# Altium PCB GPS.PcbDoc
Units mil, origin at the board's own origin, x right, y up, seen from the top; angles counter-clockwise.
Board outline 1574.8 x 1574.8 mil, 4 copper layers (Top Layer, Mid Layer 1, Mid Layer 2, Bottom Layer), stack 61.811 mil thick; 21 components, 16 nets, 92 pads, 613 vias.
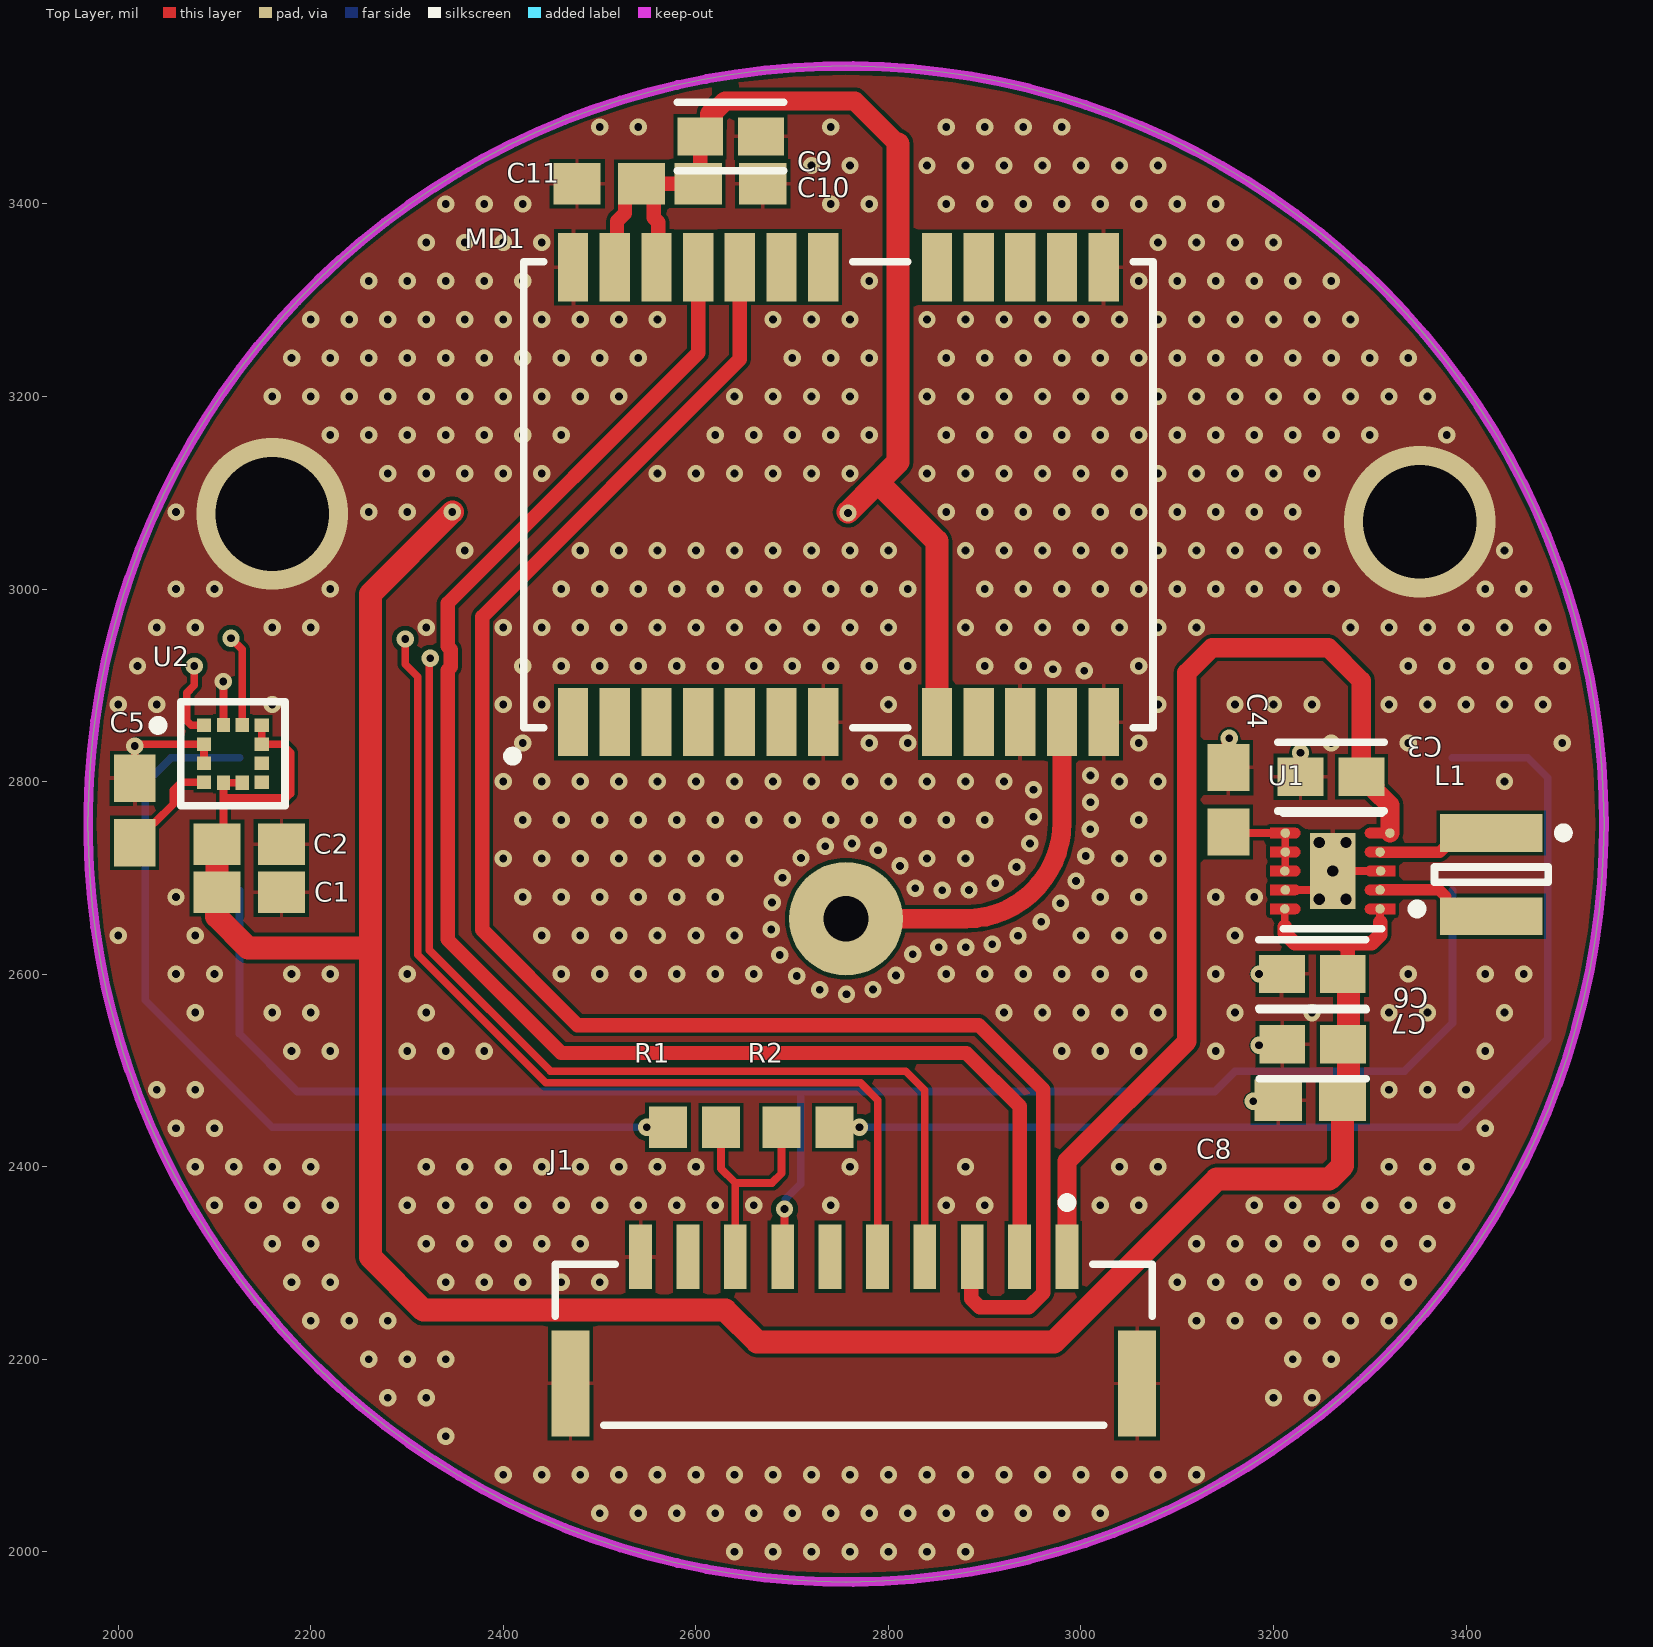
[diagram p0: Top Layer view]
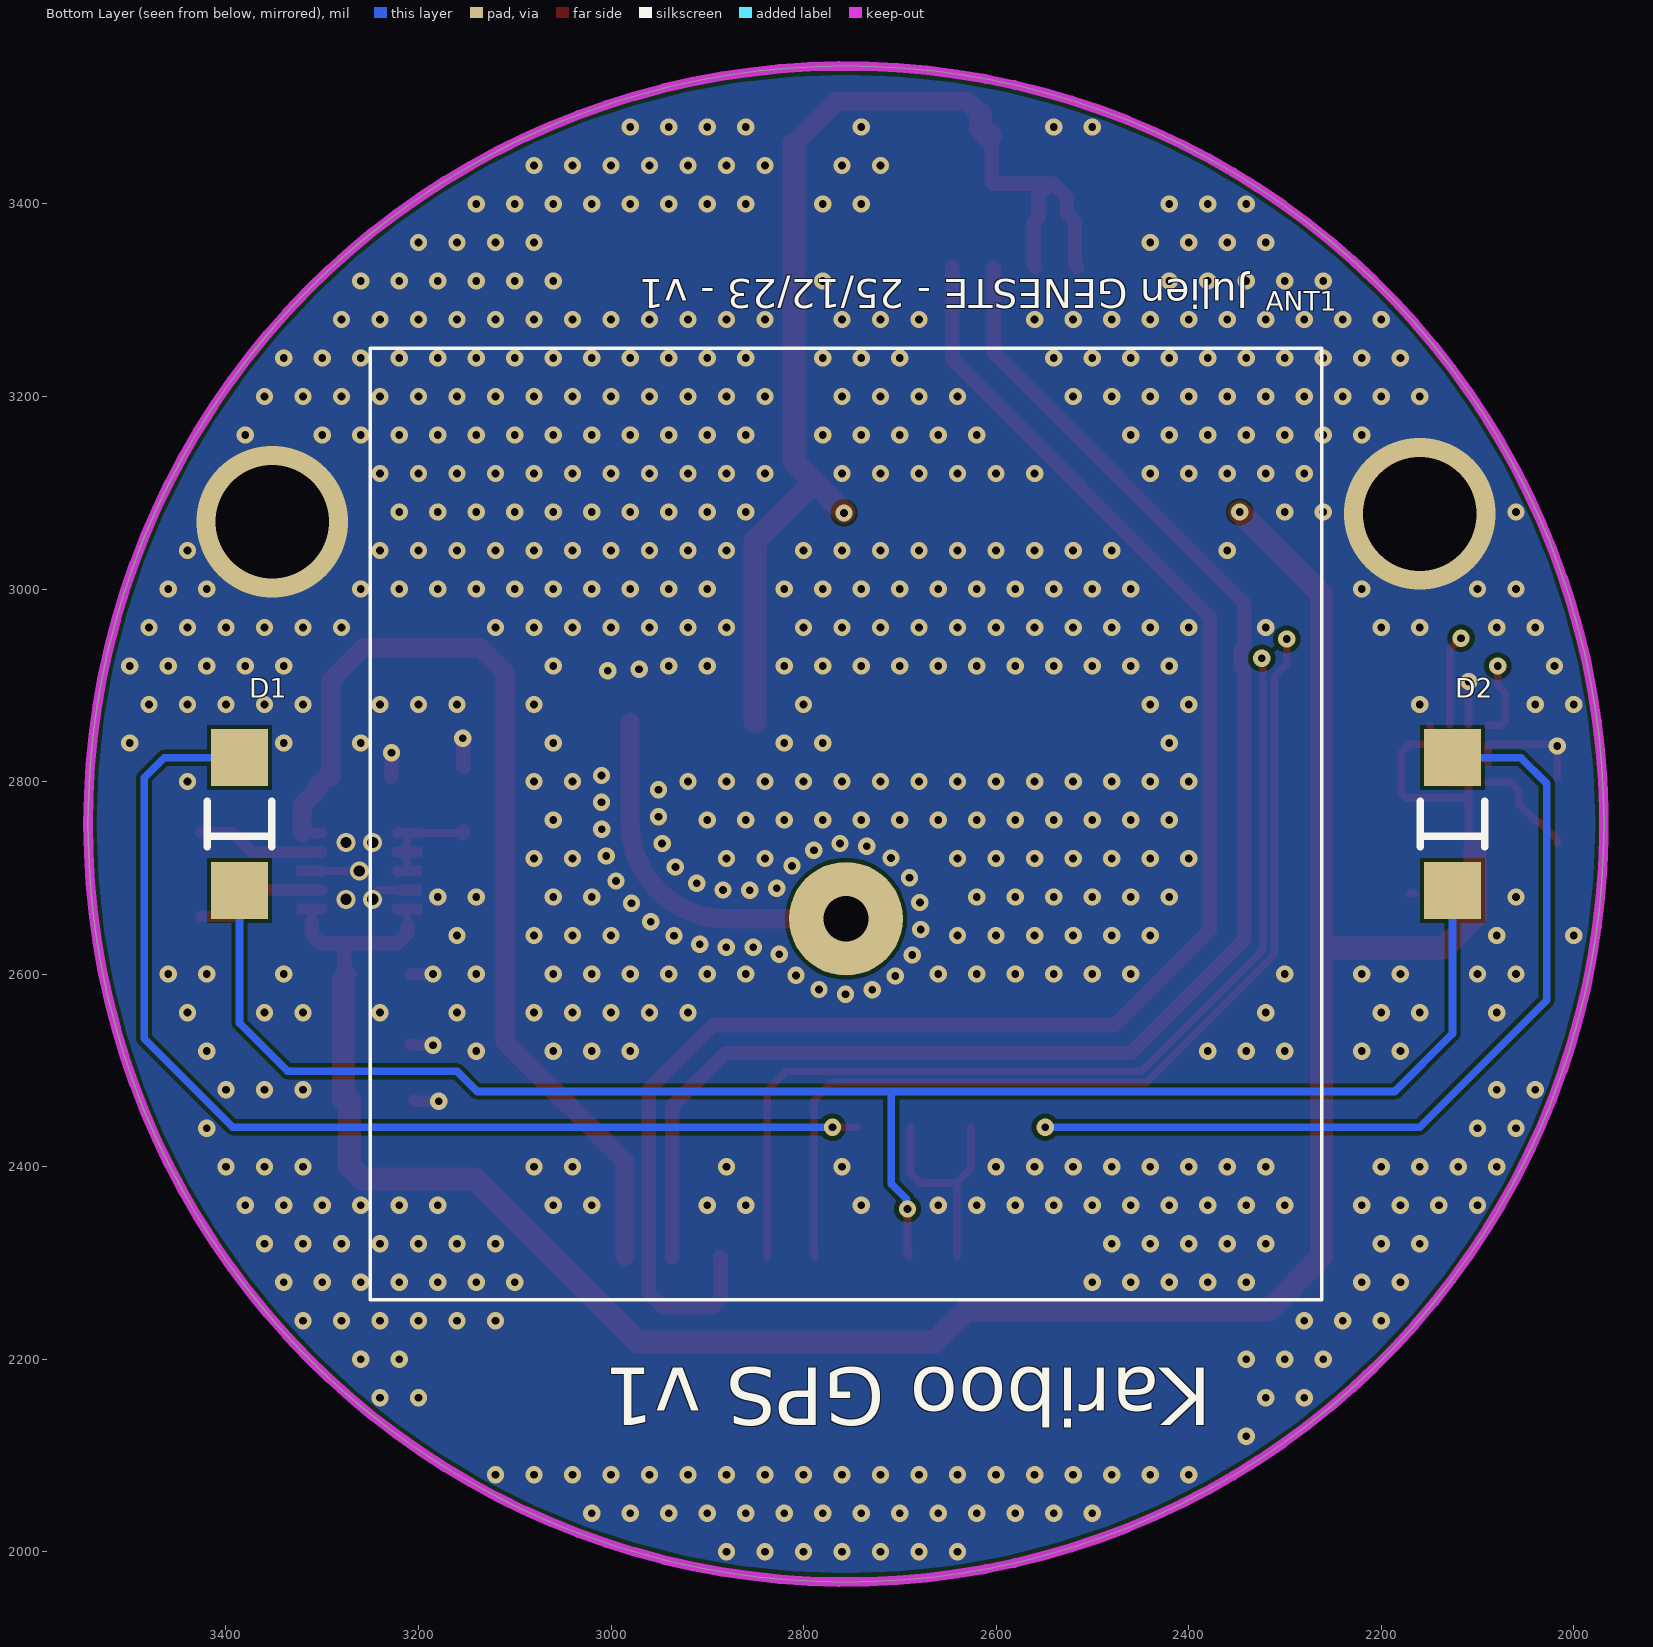
[diagram p1: Bottom Layer view, seen from below]
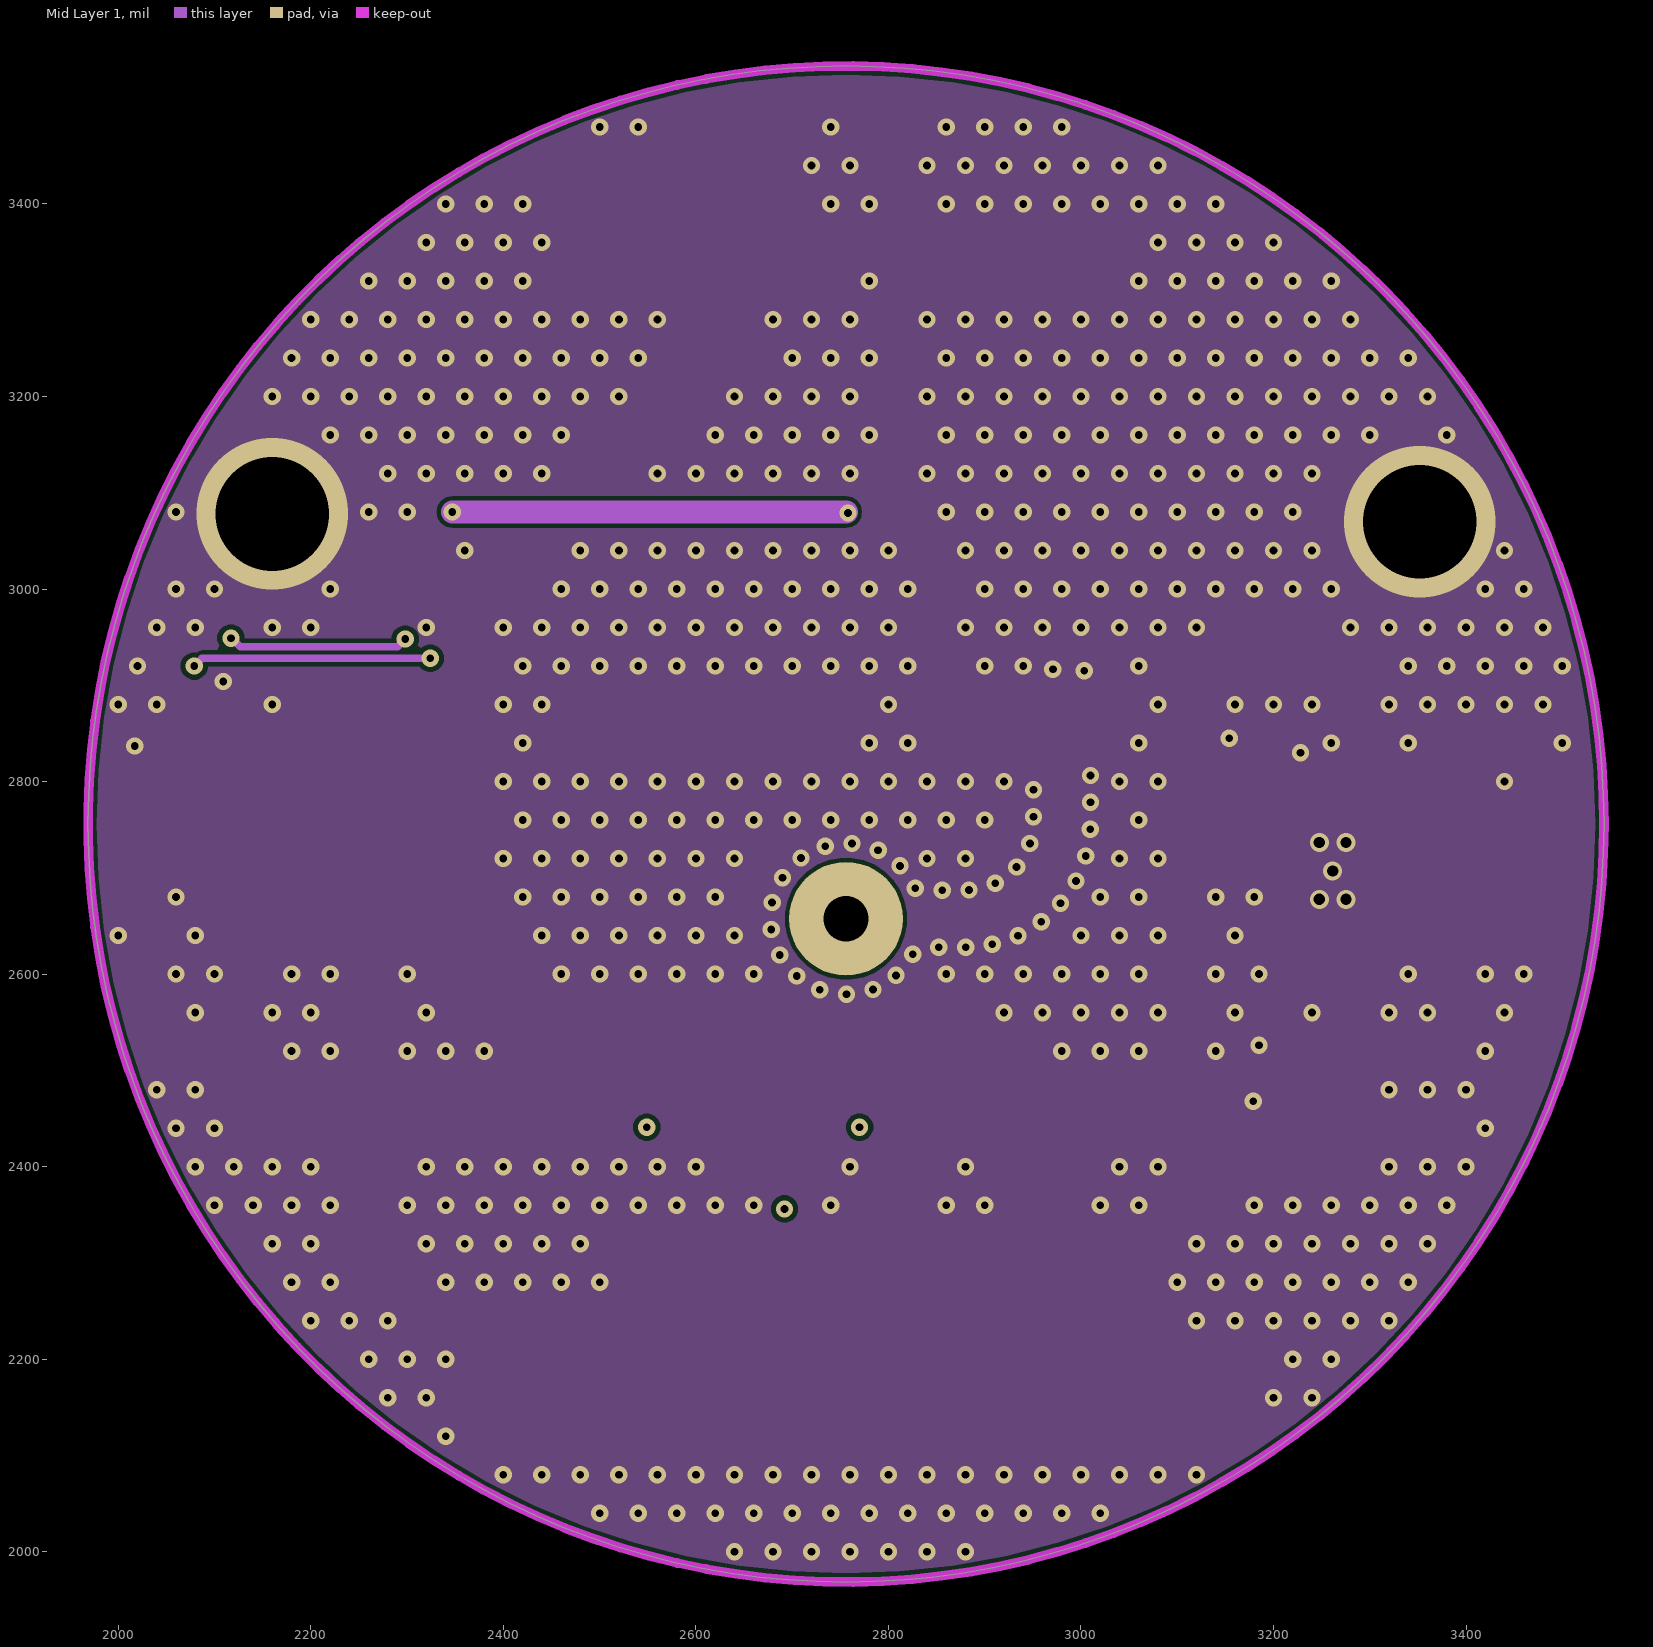
[diagram p2: Mid Layer 1]
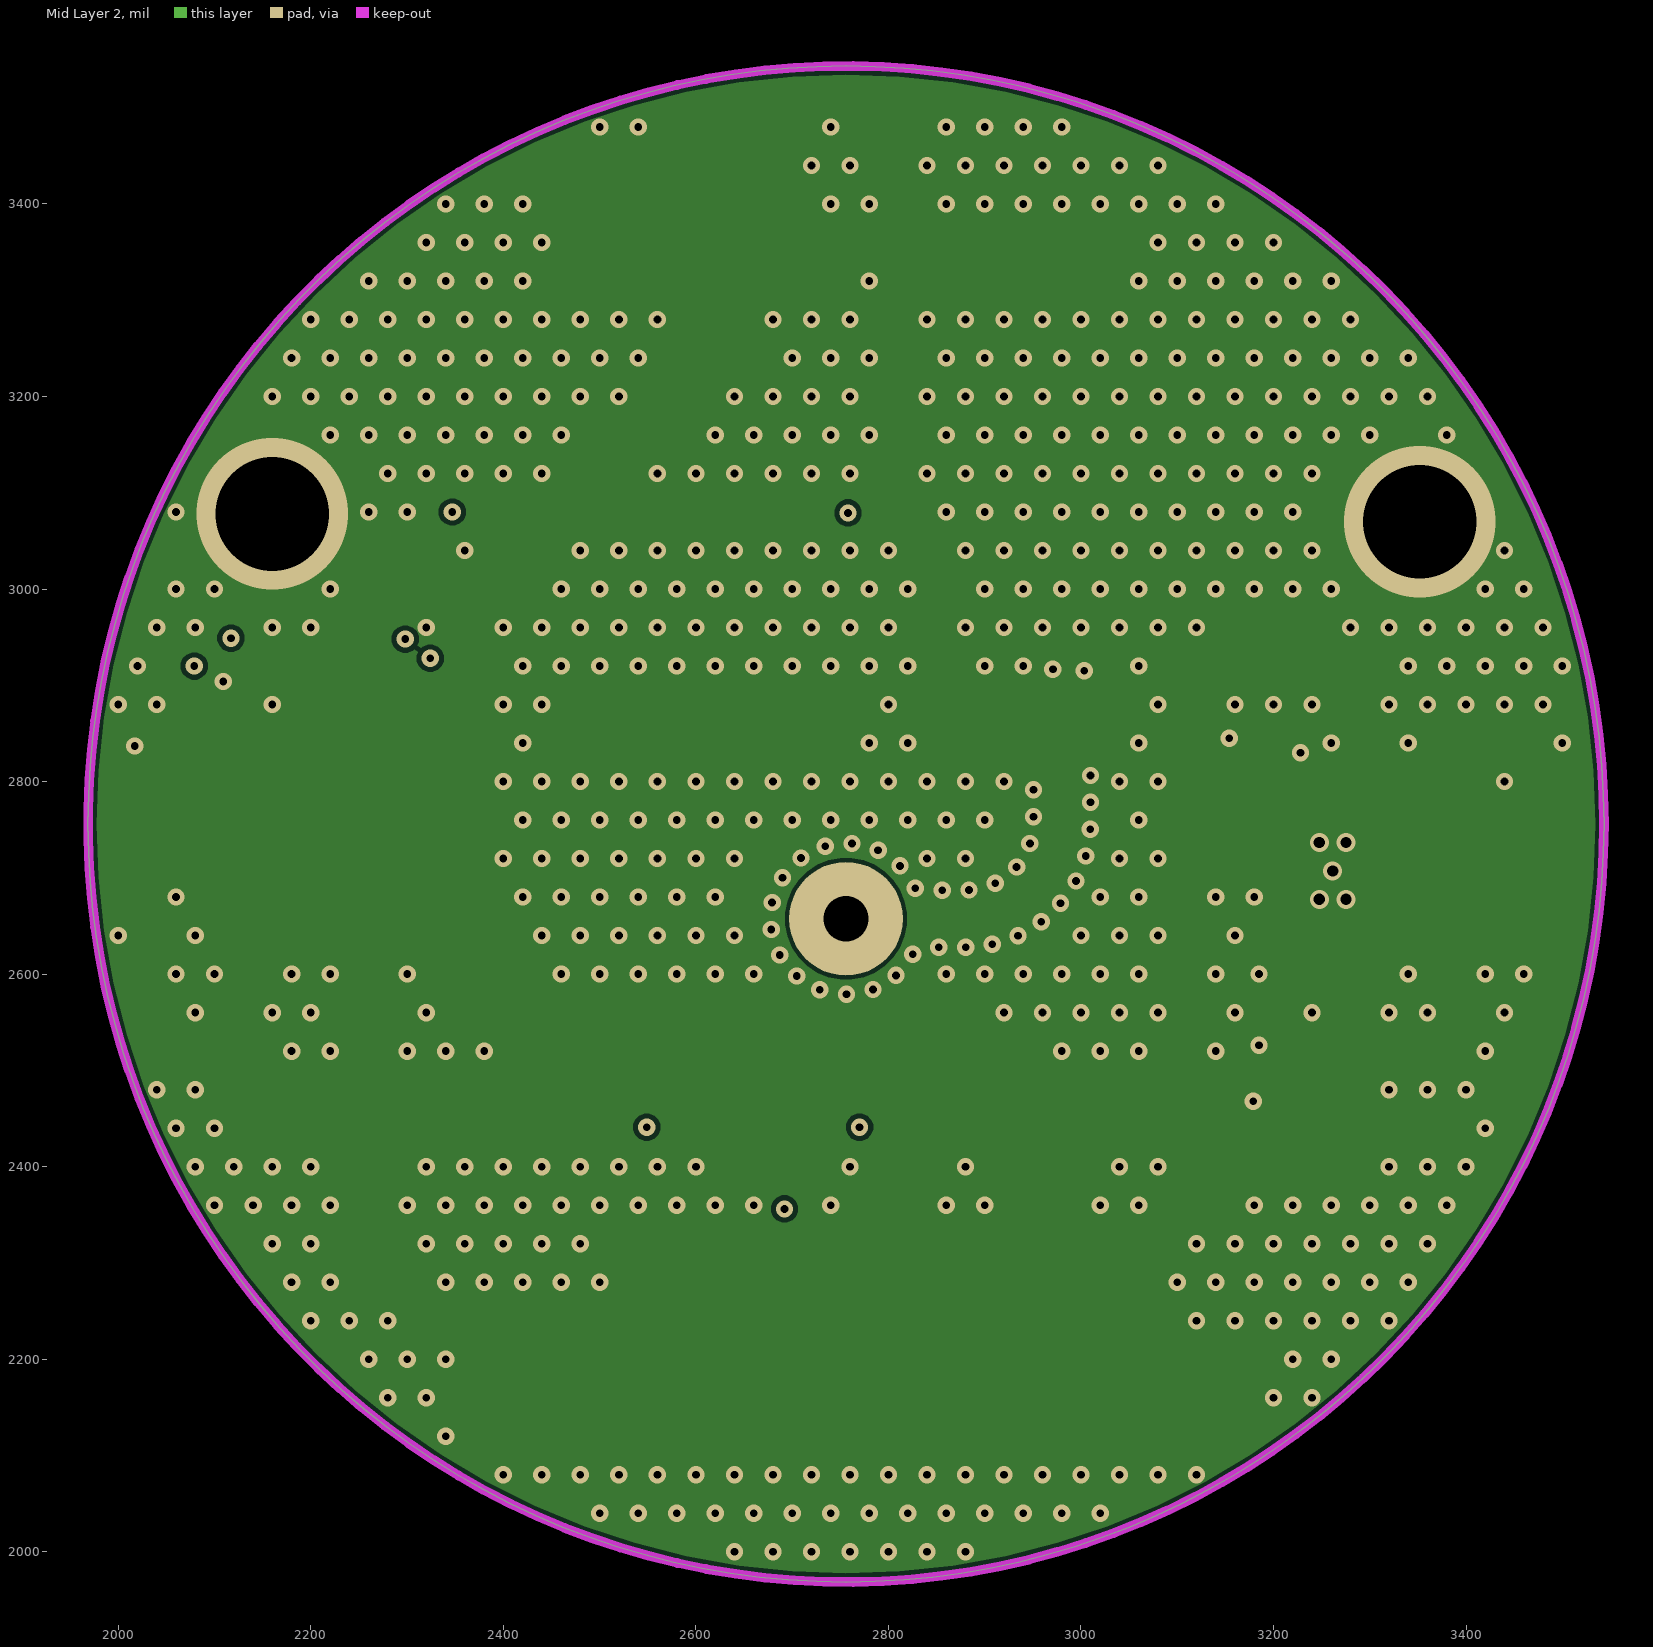
[diagram p3: Mid Layer 2]

## Layer stack, top to bottom
Top Solder: solder mask 0.5, Solder Resist, Dk 3.8
Top Layer: signal copper 1.378
Dielectric 1: prepreg 3.937, 2313, Dk 4.05
Mid Layer 1: signal copper 0.689
Core: core 49.8031, FR-4, Dk 4.5
Mid Layer 2: signal copper 0.689
Dielectric 2: prepreg 3.937, 2313, Dk 4.05
Bottom Layer: signal copper 1.378
Bottom Solder: solder mask 0.5, Solder Resist, Dk 3.8

## Board outline
2755.91,1968.5 cw(c2755.91,2755.91) 1968.5,2755.91 cw(c2755.91,2755.91) 2755.91,3543.31 cw(c2755.91,2755.91) 3543.31,2755.91 cw(c2755.91,2755.91)

## Design rules (kind name [scope] priority, off if disabled: settings)
BoardOutlineClearance [All] p1: gap=7.87 ignorepadtopadclearanceinfootprint=FALSE
Clearance [All] p1: gap=4 ignorepadtopadclearanceinfootprint=FALSE except(5: Arc-Via Track-Via SMDPad-Via THPad-Via Via-Via Via-Fill Via-Poly Via-Region Via-Text; 9.84: Arc-Hole Track-Hole SMDPad-Hole THPad-Hole Via-Hole Fill-Hole Poly-Hole Region-Hole Text-Hole)
ComponentClearance [All] p1: gap=4 collisioncheckmode=3 verticalgap=4 showdistances=TRUE
DiffPairsRouting [All] p1: maxlimit=4 minlimit=4 mostfreqgap=4 toplayer_minwidth=4 toplayer_maxwidth=71497.94 toplayer_prefwidth=4 midlayer1_minwidth=4 midlayer1_maxwidth=71497.94 midlayer1_prefwidth=4 midlayer2_minwidth=4 midlayer2_maxwidth=71497.94 midlayer2_prefwidth=4 bottomlayer_minwidth=4 bottomlayer_maxwidth=71497.94 bottomlayer_prefwidth=4 maxuncoupledlength=500
Height [All] p1: minheight=0 maxheight=71497.94 prefheight=500
HoleSize [All] p1: absolutevalues=TRUE maxlimit=248.03 minlimit=7.87 maxpercent=80.000 minpercent=20.000
HoleToHoleClearance [All] p1: gap=9.84 allowstackedmicrovias=FALSE
MinimumAnnularRing [All] p1: minimumring=3
MinimumSolderMaskSliver [All] p1: minsoldermaskwidth=0
PlaneClearance [All] p1: clearance=4
PlaneConnect PlaneConnectPowerPads [InPadClass('PowerPads')] p1: planeconnectstyle=Direct reliefexpansion=20 reliefentries=4 reliefconductorwidth=10 reliefairgap=10
PlaneConnect [All] p2: pad.planeconnectstyle=Relief pad.reliefexpansion=11.81 pad.reliefentries=4 pad.reliefconductorwidth=4 pad.reliefairgap=4 via.planeconnectstyle=Direct via.reliefexpansion=11.81 via.reliefentries=4 via.reliefconductorwidth=5 via.reliefairgap=5
PolygonConnect PolygonConnectPowerPads [All vs (InPadClass('PowerPads'))] p1: connectstyle=Direct reliefconductorwidth=10 reliefentries=4 polygonreliefangle="90 Angle" airgapwidth=10
PolygonConnect [All] p2: thpad.connectstyle=Relief thpad.reliefconductorwidth=4 thpad.reliefentries=4 thpad.polygonreliefangle="90 Angle" thpad.airgapwidth=4 smdpad.connectstyle=Relief smdpad.reliefconductorwidth=4 smdpad.reliefentries=4 smdpad.polygonreliefangle="90 Angle" smdpad.airgapwidth=4 via.connectstyle=Direct via.reliefconductorwidth=5 via.reliefentries=4 via.polygonreliefangle="90 Angle" via.airgapwidth=5
RoutingVias [All] p1: holewidth=7.87 width=17.72 viastyle="Through Hole" minholewidth=7.87 minwidth=17.72 maxholewidth=248.03 maxwidth=257.87
SilkToSilkClearance [All] p1: silktosilkclearance=0
SilkToSolderMaskClearance [IsPad] p1: minsilkscreentomaskgap=4 clearancetoexposedcopper=TRUE
SolderMaskExpansion [All] p1: expansion=2.95 istentingtop=FALSE
Width [All] p1: maxlimit=71497.94 minlimit=4 preferedwidth=4
20 further rules are at their usual default settings.

## Components (designator, comment, footprint, x,y, rotation, side; value= is the part's Value field where it differs from the comment)
ANT1 "CGGP.25.4.E.02" CGGP254E02 2755.91,2755.91 r180 bottom
C1 "100nF 0603" CAPC1608X90X35ML15T15 2136,2685 r0 top
C2 "100nF 0603" CAPC1608X90X35ML15T15 2136,2735 r0 top
C3 "10uF 0603" FP-GRM188-0_1-e0_2_0_55-IPC_A 3259.68,2805.1 r180 top
C4 "100nF 0603" CAPC1608X90X35ML15T15 3153.25,2781.1 r270 top
C5 "100nF 0603" CAPC1608X90X35ML15T15 2017,2770 r90 top
C6 "10uF 0603" FP-GRM188-0_1-e0_2_0_55-IPC_A 3240.25,2600.1 r180 top
C7 "10uF 0603" FP-GRM188-0_1-e0_2_0_55-IPC_A 3240.68,2527.1 r180 top
C8 "100nF 0603" CAPC1608X90X35ML15T15 3238.25,2469.1 r0 top
C9 "10uF 0603" FP-GRM188-0_1-e0_2_0_55-IPC_A 2636,3470 r0 top
C10 "100nF 0603" CAPC1608X90X35ML15T15 2636,3421 r180 top
C11 "100nF 0603" CAPC1608X90X35ML15T15 2510,3421 r0 top
D1 "HSMG-C150" FP-HSMG-C150-MFG 3385.83,2755.91 r90 bottom
D2 "HSMG-C150" FP-HSMG-C150-MFG 2125.98,2755.91 r90 bottom
J1 "BM10B-GHS-TBT(LF)(SN)(N)" FP-BM10B-GHS-TBT_LF_SN-MFG 2764,2215 r0 top
L1 "SRN3015-1R5Y" BOUR-SRN3015-2_V 3426.25,2703.4 r270 top
MD1 "NEO-M9N-00B" FP-NEO-M9N-00B-MFG 2748,3098 r180 top
R1 "ERA-3AEB391V" RESC1608X55X30ML20T20 2598.43,2440.94 r0 top
R2 "ERA-3AEB391V" RESC1608X55X30ML20T20 2716.54,2440.94 r180 top
U1 "TPS63031DSKR" FP-DSK0010A-MFG 3261.46,2707.1 r180 top
U2 "LIS3MDLTR" FP-VFLGA-12-8365767-MFG 2119.02,2828.84 r0 top

## Footprints (in the part's own frame and the unit in brackets; to place one, negate y for a bottom-side part, rotate by r counter-clockwise, add the part's x,y. Pads: shape width x height; smd on the part's side, far side on the other; paste and mask are expansions set on the pad)
BOUR-SRN3015-2_V [mm] "SMD, 2-Leads, Body 3x3mm, Height 1.5mm"
  rect 1x2.7 smd: 1(-1.1,0) 2(1.1,0)
  silkscreen extent -1.22,-1.5 0.2,2.03, body extent -1.5,-1.5 1.5,1.5, height 1.5
CAPC1608X90X35ML15T15 [mm] "Chip Capacitor, 2-Leads, Body 1.60x0.81mm, IPC Low Density"
  rect 1.25x1.1 smd: 1(-0.85,0) 2(0.85,0)
  body extent -0.88,-0.48 0.87,0.48, height 0.9
CGGP254E02 [mm]
  round 3 hole 1.2: 1(0,-2.5)
  silkscreen extent -12.55,-12.55 12.55,12.55, body extent -12.55,-12.55 12.55,12.55, height 5.4
FP-BM10B-GHS-TBT_LF_SN-MFG [mm]
  rect 0.6x1.7 smd paste+0 mask+0: 1(5.625,2.325) 2(4.375,2.325) 3(3.125,2.325) 4(1.875,2.325) 5(0.625,2.325) 6(-0.625,2.325) 7(-1.875,2.325) 8(-3.125,2.325) 9(-4.375,2.325) 10(-5.625,2.325)
  rect 1x2.8 smd paste+0 mask+0: 11(-7.475,-1.025) 12(7.475,-1.025)
  silkscreen extent -7.88,-2.12 7.88,3.87, body extent -8.08,-2.52 8.08,3.27, height 0.25
FP-DSK0010A-MFG [mm]
  round 0.252 smd paste-1000 mask+0: 1(-1.25,1) 2(-1.25,0.5) 3(-1.264,0) 4(-1.25,-0.5) 5(-1.51,-1) 6(1.25,-1) 7(1.25,-0.5) 8(1.264,0) 9(1.25,0.5) 10(1.264,1)
  rect 1.2x2 smd paste-1000 mask+0: 11(0,0)
  Top Layer region: 1.65,0.86 0.99,0.86 0.936,0.871 0.891,0.901 0.861,0.946 0.85,1 0.85,1 0.861,1.054 0.891,1.099 0.936,1.129 0.99,1.14 0.99,1.14 1.65,1.14
  Top Layer region: 1.65,0.36 0.99,0.36 0.936,0.371 0.891,0.401 0.861,0.446 0.85,0.5 0.85,0.5 0.861,0.554 0.891,0.599 0.936,0.629 0.99,0.64 0.99,0.64 1.65,0.64
  Top Layer region: 1.65,-0.14 0.99,-0.14 0.936,-0.129 0.891,-0.099 0.861,-0.054 0.85,0 0.85,0 0.861,0.054 0.891,0.099 0.936,0.129 0.99,0.14 0.99,0.14 1.65,0.14
  Top Layer region: 1.65,-0.64 0.99,-0.64 0.936,-0.629 0.891,-0.599 0.861,-0.554 0.85,-0.5 0.85,-0.5 0.861,-0.446 0.891,-0.401 0.936,-0.371 0.99,-0.36 0.99,-0.36 1.65,-0.36
  Top Layer region: 1.65,-1.14 0.99,-1.14 0.936,-1.129 0.891,-1.099 0.861,-1.054 0.85,-1 0.85,-1 0.861,-0.946 0.891,-0.901 0.936,-0.871 0.99,-0.86 0.99,-0.86 1.65,-0.86
  Top Layer region: -1.65,-0.86 -0.99,-0.86 -0.936,-0.871 -0.891,-0.901 -0.861,-0.946 -0.85,-1 -0.85,-1 -0.861,-1.054 -0.891,-1.099 -0.936,-1.129 -0.99,-1.14 -0.99,-1.14 -1.65,-1.14
  Top Layer region: -1.65,-0.36 -0.99,-0.36 -0.936,-0.371 -0.891,-0.401 -0.861,-0.446 -0.85,-0.5 -0.85,-0.5 -0.861,-0.554 -0.891,-0.599 -0.936,-0.629 -0.99,-0.64 -0.99,-0.64 -1.65,-0.64
  Top Layer region: -1.65,0.14 -0.99,0.14 -0.936,0.129 -0.891,0.099 -0.861,0.054 -0.85,0 -0.85,0 -0.861,-0.054 -0.891,-0.099 -0.936,-0.129 -0.99,-0.14 -0.99,-0.14 -1.65,-0.14
  Top Layer region: -1.65,0.64 -0.99,0.64 -0.936,0.629 -0.891,0.599 -0.861,0.554 -0.85,0.5 -0.85,0.5 -0.861,0.446 -0.891,0.401 -0.936,0.371 -0.99,0.36 -0.99,0.36 -1.65,0.36
  Top Layer region: -1.65,1.14 -0.99,1.14 -0.936,1.129 -0.891,1.099 -0.861,1.054 -0.85,1 -0.85,1 -0.861,0.946 -0.891,0.901 -0.936,0.871 -0.99,0.86 -0.99,0.86 -1.65,0.86
  silkscreen extent -2.35,-1.53 1.3,1.53, body extent -1.75,-1.4 1.75,1.4, height 0.25
FP-GRM188-0_1-e0_2_0_55-IPC_A [mil]
  rect 47.57x39.85 smd paste+0 mask+0: 1(-31.57,0) 2(31.57,0)
  silkscreen extent -55,-36 55,36, body extent -75,-40 75,40, height 10
FP-HSMG-C150-MFG [mm]
  rect 1.5x1.5 smd paste+0 mask+0: 1(-1.75,0) 2(1.75,0)
  silkscreen extent -0.6,-0.85 0.6,0.85, body extent -1.6,-0.8 1.6,0.8, height 1.2
FP-NEO-M9N-00B-MFG [mm]
  rect 0.8x1.8 smd paste-1000 mask-1000: 1(7,6) 2(5.9,6) 3(4.8,6) 4(3.7,6) 5(2.6,6) 6(1.5,6) 7(0.4,6) 8(-2.6,6) 9(-3.7,6) 10(-4.8,6) 11(-5.9,6) 12(-7,6) 13(-7,-6) 14(-5.9,-6) 15(-4.8,-6) 16(-3.7,-6) 17(-2.6,-6) 18(0.4,-6) 19(1.5,-6) 20(2.6,-6) 21(3.7,-6) 22(4.8,-6) 23(5.9,-6) 24(7,-6)
  silkscreen extent -8.3,-6.15 8.72,7.02, body extent -8.4,-7.4 8.4,7.4, height 0.25
FP-VFLGA-12-8365767-MFG [mm]
  rect 0.375x0.35 smd paste+0 mask+0: 1(-0.763,0.75) 2(-0.763,0.25) 3(-0.763,-0.25) 4(-0.763,-0.75) 7(0.763,-0.75) 8(0.763,-0.25) 9(0.763,0.25) 10(0.763,0.75)
  rect 0.35x0.375 smd paste+0 mask+0: 5(-0.25,-0.763) 6(0.25,-0.763) 11(0.25,0.763) 12(-0.25,0.763)
  silkscreen extent -2.1,-1.38 1.38,1.38, body extent -1.58,-1.58 1.58,1.58, height 0.25
RESC1608X55X30ML20T20 [mm] "Chip Resistor, 2-Leads, Body 1.60x0.80mm, IPC Low Density"
  rect 1x1.1 smd: 1(-0.7,0) 2(0.7,0)
  body extent -0.9,-0.5 0.9,0.5, height 0.55

## Part data
ANT1: "Antenna", Manufacturer_Name=Taoglas, Mouser Part Number=960-CGGP.25.4.E.02, Arrow Part Number=CGGP.25.4.E.02, Arrow Price/Stock=https://www.arrow.com/en/products/cggp.25.4.e.02/taoglas?region=nac, Datasheet Link=https://www.taoglas.com/wp-content/uploads/2015/04/CGGP.25.4.E.02.pdf, Height=5.3mm, Manufacturer_Part_Number=CGGP.25.4.E.02, Mouser Price/Stock=https://www.mouser.co.uk/ProductDetail/Taoglas/CGGP.25.4.E.02?qs=GmNq1OH0n5S3R7U0xHuQag%3D%3D
C1 C2 C4 C5 C8 C10 C11: library part CMP-2006-04496-1, Manufacturer="AVX Interconnect / Elco", Part Number=0603YC104KAZ2A
C3 C6 C7 C9: library part CMP-2006-02792-2, "Chip Multilayer Ceramic Capacitors for General Purpose, 0603, 10uF, X5R, 15%, 20%, 6.3V", Capacitance=10uF, Case Code (Imperial)=0603, Case Code (Metric)=1608, Dielectric=X5R, Max Operating Temperature=85°C, Min Operating Temperature=-55°C, Package Quantity=4000, Tolerance=20%, Voltage=6.3V, Case/Package=0603, Depth=0.8mm, Height=0.8mm, Lead Free="Lead Free", Length=1.6mm, Material=Ceramic, Mount="Surface Mount", Packaging="Tape and Reel", Radiation Hardening=No, REACH SVHC="No SVHC", Termination=SMD/SMT, Thickness=0.035inch, Voltage Rating=6.3V, Voltage Rating (DC)=6.3V, Width=0.031inch
D1 D2: library part CMP-2000-05061-2, "LED GREEN DIFFUSED 1206 SMD", Colour=Green, Forward Current=20mA, Forward Voltage=2.2V, Manufacturer=Broadcom, Max Junction Temp=+95°C, Power Dissipation=65mW, Reverse Voltage=5V, Temperature="-40°C to +85°C", Temperature Range High=+85°C, Temperature Range Low=-40°C, Automotive=No, Category=Diode, ComponentLink2Description=Datasheet, ComponentLink2URL=https://docs.broadcom.com/docs/AV02-0551EN, Device Class L1=Optoelectronics, Device Class L2=LEDs, Device Class L3=unset, Digikey Description="LED GREEN DIFFUSED 1206 SMD", Height=1.2mm, Ipc Land Pattern Name=DIOCP320160X55, Lead Free=Yes, Led Orientation="Top View", Luminous Intensity=15mcd, Manufacturer Part Number=HSMG-C150, Mouser Description="LED Uni-Color Green 570nm 2-Pin Chip LED T/R", Octopart=https://octopart.com/hsmg-c150-broadcom-71131304, Package=HSMG-C150, Peak Emmision Wavelength=570nm, RoHS=TRUE, Viewing Angle=170°, Wavelength=572nm
J1: library part CMP-17439-000269-1, "CONN HEADER SMD 10POS 1.25MM", Flammability Rating="UL94 V-0", Insulation Color=Natural, Max Operating Temperature=85°C, Min Operating Temperature=-25°C, Voltage Rating=50V, Connector Type=Header, Contact Finish - Mating=TIN, Contact Material=Bronze, Contact Shape=Rectangular, Contact Type="Outer Shroud Contact", Fastening Type=Ramp, Insulation Material=Nylon, Mated Stacking Heights=7.3mm, Mount="Surface Mount", Number of Positions=10, Number of Rows=1, Packaging="Cut Tape", Series=GH, Termination=Solder
L1: library part CMP-0007-00008-1, "Semi-shielded Power Inductor, 1.5 uH, +/- 30%, 2.1 A, -40 to 125 degC, 3 x 3 x 1.5 mm SMD, RoHS and Halogen Free, Tape and Reel", Inductance="1.5 uH", Inductance tolerance="+/- 30%", Manufacturer=Bourns, Operating Temperature="-40 to 125 degC", Rated current="2.1 A", Resistance to Solder Heat="+260 degC for 10 sec.", ComponentLink1Description="Manufacturer URL", ComponentLink1URL=http://www.bourns.com/, ComponentLink2Description=Datasheet, ComponentLink2URL=http://www.bourns.com/data/global/pdfs/SRN3015.pdf, ComponentLink3Description="Package Specification", ComponentLink3URL=http://www.bourns.com/data/global/pdfs/SRN3015.pdf, DatasheetVersion=Aug-11, DCR Max="0.066 Ohm", Isat="2 A", Mounting Technology="Surface Mount", PackageDescription="2-Pin SMD, Body 3 x 3 mm, Height 1.5 mm", PackageReference=SRN3015, Packing="Tape and Reel", PartNumber=SRN3015-1R5Y, RoHS=TRUE, SRF Min="130 MHz"
MD1: library part CMP-207130-000006-2, "M9 standard precision module", Manufacturer=u-blox, Max Supply Voltage=3.6V, Min Supply Voltage=1.65V, Package=0, Temperature="-40°C to +85°C", Temperature Range High=+85°C, Temperature Range Low=-40°C, Automotive=No, Category=UNK, ComponentLink2Description=Datasheet, ComponentLink2URL=https://www.u-blox.com/sites/default/files/NEO-M9N_DataSheet_%28UBX-19014285%29.pdf, Device Class L1="Integrated Circuits (ICs)", Device Class L2="RF Semiconductors and Devices", Device Class L3="RF Receivers", Footprint Url=https://www.u-blox.com/sites/default/files/NEO-M9N_Integrationmanual_%28UBX-19014286%29.pdf, Height=2.6mm, Interface=I2C,SPI,UART,USB, Lead Free=Yes, Manufacturer Part Number=NEO-M9N-00B, Octopart=https://octopart.com/neo-m9n-00b-u-blox-107315722, RoHS=TRUE, Sensitivity=-167dBm
R1 R2: library part CMP-2000-00051-1, Manufacturer=Panasonic, Part Number=ERA-3AEB391V
U1: library part CMP-04918-000123-1, "IC REG BCK BST ADJ 900MA 10SON", Ambient Temperature Range High=+85°C, Ambient Temperature Range Low=-40°C, Manufacturer="Texas Instruments", Max Junction Temp=+125°C, Max Supply Voltage=5.5V, Min Supply Voltage=1.8V, Nominal Supply Current=25uA, Output Current=1A, Output Voltage=1.2-5.5V, Package=DSK0010A, Switching Frequency=2400kHz, Temperature="-40°C to +85°C", Automotive=No, Category=IC, ComponentLink2Description=Datasheet, ComponentLink2URL=http://www.ti.com/lit/ds/symlink/tps63030.pdf, Device Class L1="Integrated Circuits (ICs)", Device Class L2="Power Management ICs", Device Class L3="Voltage Regulators - Switching", Digikey Description="IC REG BCK BST ADJ 900MA 10SON", Height=0.8mm, Ipc Land Pattern Name=DFN250X250X75-10, Lead Free=Yes, Manufacturer Part Number=TPS63031DSKR, Max Duty Cycle=100%, Mouser Description="Voltage Regulators - Switching Regulators Hi Eff Sgl Inductor Buck-Boost Conv", Number Of Outputs=1, Octopart=https://octopart.com/tps63030dskr-texas+instruments-12188297, Output Type=AdjustableProgrammable, RoHS=TRUE, Standoff Height=0mm, Switching Topology=Buck-Boost, Temperature Range High=+85°C, Temperature Range Low=-40°C
U2: library part CMP-2000-07463-2, "SENSOR MR I2C/SPI 12LGA", Manufacturer=STMicroelectronics, Max Supply Voltage=3.6V, Min Supply Voltage=1.71V, Operating Supply Current=40-270uA, Package=VFLGA-12-8365767, Temperature="-40°C to +85°C", Temperature Range High=+85°C, Temperature Range Low=-40°C, Automotive=No, Category=IC, ComponentLink2Description=Datasheet, ComponentLink2URL=https://www.st.com/resource/en/datasheet/lis3mdl.pdf, Device Class L1=Sensors, Device Class L2="Magnetic Sensors", Device Class L3=unset, Digikey Description="SENSOR MR I2C/SPI 12LGA", Footprint Url=https://www.st.com/content/ccc/resource/technical/document/technical_note/73/17/9c/16/dd/96/4a/01/CD00134799.pdf/files/CD00134799.pdf/jcr:content/translations/en.CD00134799.pdf, Height=1mm, Lead Free=Yes, Manufacturer Part Number=LIS3MDLTR, Mouser Description="Board Mount Hall Effect / Magnetic Sensors Ultra Lo-Pwr Hi Perf 3-Axis 1.9-3.6V", Octopart=https://octopart.com/lis3mdltr-stmicroelectronics-29403125, RoHS=TRUE, Sensing Method=Magnetic, Sensor Output=I2C,SPI

## Via types
v1: diameter 18, hole 8, Top Layer to Bottom Layer, 606 vias
v2: diameter 19.68, hole 11.81, Top Layer to Bottom Layer, 5 vias
v3: diameter 157.48, hole 118.11, Top Layer to Bottom Layer, 2 vias

## Nets (pads, with @x,y where several pads share a name; then routed paths per layer and width w, separated by ;. In a path a pad name is that pad's centre, name@x,y a point inside that pad or via, vN(x,y) a via of type N, cw(c..) or ccw(c..) an arc to the next point about the centre after c; other vN are vias at no path point)
+3V3: C1.1 C2.1 C6.1 C7.1 C8.2 C9.1 C10.2 C11.2 MD1.8 MD1.22 MD1.23 U1.1 U1.10 U2.5 U2.6 U2.9 U2.10 | length 4475.2
  Top Layer w8: C2.1 2109.18,2741.64 2109.18,2783 ; U2.6 U2.5 2109.18,2783 ; U2.10 U2.9 2170.32,2838.68 2179,2830 2179,2787.69 2174.31,2783 2109.18,2783 ; 3211.68,2649.32 U1.10 ; U1.1 3310.68,2654.32 3311,2654
  Top Layer w15: 2260.54,2874.46 2262,2873 ; MD1.23 2518,3336.5 2518,3382 2526.36,3390.36 2526.36,3406.85 2540.51,3421 C11.2 ; MD1.22 2561,3336.2 2561,3381 2556.27,3385.73 2556.27,3408.19 C11.2 ; C9.1@2606,3471.57 C9.1 2604.43,3422.89 C10.2 C11.2 ; 3211.68,2649.32 3211.68,2642.32 3222,2632 3271,2632 ; C6.1@3278,2593.91 C6.1 3277,2605.28 3277,2626 3271,2632 ; 3311,2654 3311,2640.79 3302.21,2632 3271,2632
  Top Layer w20: 2616.22,3492.94 2630.28,3507 2765,3507 2810,3462
  Top Layer w24: C2.1 C1.1 2102,2684.46 2102,2660 2135,2627 2262,2627 ; v1(2347,3080) 2262,2995 2262,2873 2262,2627 ; C9.1@2606,3471.57 2609.86,3471.57 2616.22,3477.92 2616.22,3492.94 ; v1@2758,3080 2789,3111 ; 2810,3462 2810,3132 2789,3111 ; MD1.8 2850.36,3049.64 2789,3111 ; C8.2 3271.71,2401.06 3257.65,2387 3141,2387 2972,2218 2663.54,2218 2630.54,2251 2317,2251 2262,2306 2262,2627 ; C8.2@3278,2469.1 C6.1@3278,2593.91
  Mid Layer 1 w15: v1@2756.19,3080 2757.19,3079 v1(2758,3079)
  Mid Layer 1 w24: v1(2347,3080) v1@2756.19,3080
+5V: C3.1 J1.1 U1.5 | length 1037.1
  Top Layer w20: J1.1 2985.46,2405.46 3110,2530 3110,2913 3136,2939 3257,2939 3291.25,2904.75 C3.1 3295.11,2805.1 3305.03,2795.17 3305.03,2791.31 3320.91,2775.43 U1.5
COMPAS_I2C_SCL: J1.4 U2.1 | length 1379.8
  Top Layer w8: v1(2079,2920) 2079,2900 2071,2892 2071,2863.06 2075.69,2858.37 U2.1 ; v1(2324,2928) 2323,2927 2323,2625 2449,2499 2818,2499 2837.82,2479.18 J1.4
  Mid Layer 1 w8: v1(2079,2920) 2087,2928 v1(2324,2928)
COMPAS_I2C_SDA: J1.5 U2.11 | length 1319.6
  Top Layer w8: v1(2117,2949) 2128.86,2937.14 U2.11 ; v1(2298,2948) 2298,2922 2311,2909 2311,2620.03 2444.03,2487 2771,2487 2789,2469 2789,2306.93 J1.5
  Mid Layer 1 w8: v1(2117,2949) 2117.69,2949 2126.69,2940 2290,2940 v1(2298,2948)
GND: C1.2 C2.2 C3.2 C4.1 C5.2 C6.2 C7.2 C8.1 C9.2 C10.1 C11.1 J1.10 J1.11 J1.12 MD1.7 MD1.10 MD1.12 MD1.13 MD1.24 U1.3 U1.9 U1.11 U2.2 U2.3 U2.12 | length 400.2
  Top Layer w8: C5.2 v1(2017,2837) 2018.68,2838.68 U2.2 U2.3 ; v1(2109,2904) 2109.18,2903.82 U2.12 ; C1.2@2164.51,2683 2166.51,2685 C1.2 C1.2@2170.46,2684 ; U1.9 3241.84,2687.41 3247.69,2681.57 v2(3247.69,2677.57) ; v2(3261.46,2707.1) U1.3
  Top Layer w12: v1(3179,2468) 3203.68,2468 C8.1 ; v1(3185,2526) 3208.01,2526 C7.2 ; v1(3185,2600) 3208.58,2600 C6.2
  Top Layer w15: C4.1 3153.62,2814.94 3153.62,2844.62 v1(3154,2845) ; v1(3228,2830) 3228,2805.2 C3.2
  other v1: 2640,2000 2680,2000 2720,2000 2760,2000 2800,2000 2840,2000 2880,2000 2500,2040 2540,2040 2580,2040 2620,2040 2660,2040 2700,2040 2740,2040 2780,2040 2820,2040 2860,2040 2900,2040 2940,2040 2980,2040 3020,2040 2400,2080 2440,2080 2480,2080 2520,2080 2560,2080 2600,2080 2640,2080 2680,2080 2720,2080 2760,2080 2800,2080 2840,2080 2880,2080 2920,2080 2960,2080 3000,2080 3040,2080 3080,2080 3120,2080 2340,2120 2280,2160 2320,2160 3200,2160 3240,2160 2260,2200 2300,2200 2340,2200 3220,2200 3260,2200 2200,2240 2240,2240 2280,2240 3120,2240 3160,2240 3200,2240 3240,2240 3280,2240 3320,2240 2180,2280 2220,2280 2340,2280 2380,2280 2420,2280 2460,2280 2500,2280 3100,2280 3140,2280 3180,2280 3220,2280 3260,2280 3300,2280 3340,2280 2160,2320 2200,2320 2320,2320 2360,2320 2400,2320 2440,2320 2480,2320 3120,2320 3160,2320 3200,2320 3240,2320 3280,2320 3320,2320 3360,2320 2100,2360 2140,2360 2180,2360 2220,2360 2300,2360 2340,2360 2380,2360 2420,2360 2460,2360 2500,2360 2540,2360 2580,2360 2620,2360 2660,2360 2740,2360 2860,2360 2900,2360 3020,2360 3060,2360 3180,2360 3220,2360 3260,2360 3300,2360 3340,2360 3380,2360 2080,2400 2120,2400 2160,2400 2200,2400 2320,2400 2360,2400 2400,2400 2440,2400 2480,2400 2520,2400 2560,2400 2600,2400 2760,2400 2880,2400 3040,2400 3080,2400 3320,2400 3360,2400 3400,2400 2060,2440 2100,2440 3420,2440 2040,2480 2080,2480 3320,2480 3360,2480 3400,2480 2180,2520 2220,2520 2300,2520 2340,2520 2380,2520 2980,2520 3020,2520 3060,2520 3140,2520 3420,2520 2080,2560 2160,2560 2200,2560 2320,2560 2920,2560 2960,2560 3000,2560 3040,2560 3080,2560 3160,2560 3240,2560 3320,2560 3360,2560 3440,2560 2756.38,2579 2728.79,2583.75 2783.93,2584.03 2704.71,2598.04 2807.82,2598.63 2060,2600 2100,2600 2180,2600 2220,2600 2300,2600 2460,2600 2500,2600 2540,2600 2580,2600 2620,2600 2660,2600 2860,2600 2900,2600 2940,2600 2980,2600 3020,2600 3060,2600 3140,2600 3340,2600 3420,2600 3460,2600 2687.11,2619.81 2825.14,2620.63 2852.17,2627.91 2880.17,2627.79 2907.98,2631.08 2000,2640 2080,2640 2440,2640 2480,2640 2520,2640 2560,2640 2600,2640 2640,2640 2934.55,2639.93 3000,2640 3040,2640 3080,2640 3160,2640 2678.19,2646.36 2958.61,2654.24 2679.13,2674.34 2978.81,2673.63 2060,2680 2420,2680 2460,2680 2500,2680 2540,2680 2580,2680 2620,2680 3020,2680 3060,2680 3140,2680 3180,2680 2855.75,2687.05 2883.75,2687.35 2827.84,2689.24 2910.87,2694.31 2994.74,2696.66 2689.96,2700.16 2933.12,2711.32 2812.06,2712.37 2400,2720 2440,2720 2480,2720 2520,2720 2560,2720 2600,2720 2640,2720 2840,2720 2880,2720 3040,2720 3080,2720 2709.14,2720.56 3004.99,2722.72 2789.24,2728.59 2734.29,2732.88 2762.15,2735.67 2946.95,2735.66 3009.49,2750.35 2420,2760 2460,2760 2500,2760 2540,2760 2580,2760 2620,2760 2660,2760 2700,2760 2740,2760 2780,2760 2820,2760 2860,2760 2900,2760 3060,2760 2950.72,2763.41 3009.85,2778.35 2950.72,2791.41 2400,2800 2440,2800 2480,2800 2520,2800 2560,2800 2600,2800 2640,2800 2680,2800 2720,2800 2760,2800 2800,2800 2840,2800 2880,2800 2920,2800 3040,2800 3080,2800 3440,2800 3009.85,2806.35 2420,2840 2780,2840 2820,2840 3060,2840 3260,2840 3340,2840 3500,2840 2000,2880 2040,2880 2160,2880 2400,2880 2440,2880 2800,2880 3080,2880 3160,2880 3200,2880 3240,2880 3320,2880 3360,2880 3400,2880 3440,2880 3480,2880 3003.44,2915.11 2970.83,2916.58 2020,2920 2420,2920 2460,2920 2500,2920 2540,2920 2580,2920 2620,2920 2660,2920 2700,2920 2740,2920 2780,2920 2820,2920 2900,2920 2940,2920 3060,2920 3340,2920 3380,2920 3420,2920 3460,2920 3500,2920 2040,2960 2080,2960 2160,2960 2200,2960 2320,2960 2400,2960 2440,2960 2480,2960 2520,2960 2560,2960 2600,2960 2640,2960 2680,2960 2720,2960 2760,2960 2800,2960 2880,2960 2920,2960 2960,2960 3000,2960 3040,2960 3080,2960 3120,2960 3280,2960 3320,2960 3360,2960 3400,2960 3440,2960 3480,2960 2060,3000 2100,3000 2220,3000 2460,3000 2500,3000 2540,3000 2580,3000 2620,3000 2660,3000 2700,3000 2740,3000 2780,3000 2820,3000 2900,3000 2940,3000 2980,3000 3020,3000 3060,3000 3100,3000 3140,3000 3180,3000 3220,3000 3260,3000 3420,3000 3460,3000 2360,3040 2480,3040 2520,3040 2560,3040 2600,3040 2640,3040 2680,3040 2720,3040 2760,3040 2800,3040 2880,3040 2920,3040 2960,3040 3000,3040 3040,3040 3080,3040 3120,3040 3160,3040 3200,3040 3240,3040 3440,3040 2060,3080 2260,3080 2300,3080 2860,3080 2900,3080 2940,3080 2980,3080 3020,3080 3060,3080 3100,3080 3140,3080 3180,3080 3220,3080 2280,3120 2320,3120 2360,3120 2400,3120 2440,3120 2560,3120 2600,3120 2640,3120 2680,3120 2720,3120 2760,3120 2840,3120 2880,3120 2920,3120 2960,3120 3000,3120 3040,3120 3080,3120 3120,3120 3160,3120 3200,3120 3240,3120 2220,3160 2260,3160 2300,3160 2340,3160 2380,3160 2420,3160 2460,3160 2620,3160 2660,3160 2700,3160 2740,3160 2780,3160 2860,3160 2900,3160 2940,3160 2980,3160 3020,3160 3060,3160 3100,3160 3140,3160 3180,3160 3220,3160 3260,3160 3300,3160 3380,3160 2160,3200 2200,3200 2240,3200 2280,3200 2320,3200 2360,3200 2400,3200 2440,3200 2480,3200 2520,3200 2640,3200 2680,3200 2720,3200 2760,3200 2840,3200 2880,3200 2920,3200 2960,3200 3000,3200 3040,3200 3080,3200 3120,3200 3160,3200 3200,3200 3240,3200 3280,3200 3320,3200 3360,3200 2180,3240 2220,3240 2260,3240 2300,3240 2340,3240 2380,3240 2420,3240 2460,3240 2500,3240 2540,3240 2700,3240 2740,3240 2780,3240 2860,3240 2900,3240 2940,3240 2980,3240 3020,3240 3060,3240 3100,3240 3140,3240 3180,3240 3220,3240 3260,3240 3300,3240 3340,3240 2200,3280 2240,3280 2280,3280 2320,3280 2360,3280 2400,3280 2440,3280 2480,3280 2520,3280 2560,3280 2680,3280 2720,3280 2760,3280 2840,3280 2880,3280 2920,3280 2960,3280 3000,3280 3040,3280 3080,3280 3120,3280 3160,3280 3200,3280 3240,3280 3280,3280 2260,3320 2300,3320 2340,3320 2380,3320 2420,3320 2780,3320 3060,3320 3100,3320 3140,3320 3180,3320 3220,3320 3260,3320 2320,3360 2360,3360 2400,3360 2440,3360 3080,3360 3120,3360 3160,3360 3200,3360 2340,3400 2380,3400 2420,3400 2740,3400 2780,3400 2860,3400 2900,3400 2940,3400 2980,3400 3020,3400 3060,3400 3100,3400 3140,3400 2720,3440 2760,3440 2840,3440 2880,3440 2920,3440 2960,3440 3000,3440 3040,3440 3080,3440 2500,3480 2540,3480 2740,3480 2860,3480 2900,3480 2940,3480 2980,3480
  other v2: 3275.24,2677.57 3247.69,2736.62 3275.24,2736.62
  other v3: 3352,3070 2160,3078
GPS_USART_RX: J1.2 MD1.21 | length 1631.2
  Top Layer w15: MD1.21 2602.33,3245.33 2342,2985 2342,2940.41 2345.5,2936.91 2345.5,2919.09 2342,2915.59 2342,2636 2460,2518 2881,2518 2936.24,2462.76 J1.2
GPS_USART_TX: J1.3 MD1.20 | length 1790.8
  Top Layer w15: MD1.20 2645.64,3238.64 2378,2971 2378,2646 2477,2547 2894,2547 2945,2496 2961,2480 2961,2269.15 2945.85,2254 2894.79,2254 2886,2262.79 2886,2305.5 J1.3
NetANT1_1: ANT1.1 MD1.11 | length 385.8
  Top Layer w20: ANT1.1 2880.28,2657.48 ccw(c2880.28,2757.48) 2980.28,2757.48 MD1.11
NetC4_2: C4.2 U1.6 U1.7 U1.8 | length 99.1
  Top Layer w8: C4.2@3154.41,2746.47 U1.6 U1.7 3212.25,2708.18 3211.68,2707.62 U1.8
  Top Layer w15: C4.2 C4.2@3154.41,2746.47
NetC5_1: C5.1 U2.4 | length 108.2
  Top Layer w8: C5.1 2017,2739.49 2034.65,2757.14 2037.61,2757.14 2057,2776.54 2057,2791 2065.31,2799.31 U2.4
NetD1_2: D1.2 R2.1 | length 1157.8
  Top Layer w8: R2.1 2744.15,2441 v1(2770,2441)
  Bottom Layer w8: v1(2770,2441) 3393,2441 3485,2533 3485,2804 3464.2,2824.8 D1.2
NetD2_2: D2.2 R1.1 | length 909.8
  Bottom Layer w8: D2.2 2054.8,2824.8 2028,2798 2028,2573 2160,2441 v1(2549,2441)
NetL1_1: L1.1 U1.4 | length 124.1
  Top Layer w12: U1.4 3312.31,2726.78 3312.63,2726.47 3372.54,2726.47 3392.78,2746.71 L1.1
NetL1_2: L1.2 U1.2 | length 130.7
  Top Layer w12: U1.2 3372.07,2687.41 3379.1,2680.38 3379.1,2673.78 3392.78,2660.1 L1.2
SAFETY_LED: D1.1 D2.1 J1.7 | length 1780.5
  Top Layer w8: J1.7 2692,2308.35 v1(2692,2356)
  Bottom Layer w8: D2.1 2125.98,2538.02 2186,2478 2709,2478 ; v1(2692,2356) 2693,2357 2693,2366 2709,2382 2709,2478 ; D1.1 3385.83,2548.83 3336,2499 3160,2499 3139,2478 2709,2478
VDD_LED: J1.8 R1.2 R2.2 | length 240.7
  Top Layer w8: R1.2 2625.98,2398.02 2640.97,2383.03 ; J1.8 2640.97,2383.03 ; R2.2 2689,2393 2679.03,2383.03 2640.97,2383.03
pads on no net: J1.6 J1.9 MD1.1 MD1.2 MD1.3 MD1.4 MD1.5 MD1.6 MD1.9 MD1.14 MD1.15 MD1.16 MD1.17 MD1.18 MD1.19 U2.7 U2.8

## Polygon pours and split planes (outlines as drawn)
GND on Mid Layer 1 "GND_L01_P-001" (solid, pour order 3): 1732.28,3700.79 3779.53,3700.79 3779.53,1811.02 1732.28,1811.02
GND on Bottom Layer "GND_L01_P-001" (solid, pour order 2): 1653.54,3661.42 3700.79,3661.42 3700.79,1771.65 1653.54,1771.65
GND on Mid Layer 2 "GND_L01_P-001" (solid, pour order 4): 1732.28,3700.79 3779.53,3700.79 3779.53,1811.02 1732.28,1811.02
GND on Top Layer "GND_L01_P-001" (solid, pour order 1): 1692.91,3661.42 3740.16,3661.42 3740.16,1771.65 1692.91,1771.65

## Keep-outs
Keep-Out Layer:
  circle w10: c2755.91,2755.91 r787.4

## Silkscreen, mask and mechanical layers (free items; w line width, h text height)
Bottom Overlay:
  text "Julien GENESTE - 25/12/23 - v1" at 2338,3322 h30 r180
  text "Kariboo GPS v1" at 2376,2191 h60 r180